# Altium PCB USB-C_Power_Supply_PCB.PcbDoc
Units mm, origin at the board's own origin, x right, y up, seen from the top; angles counter-clockwise.
Board outline 84.8 x 52.2 mm, 2 copper layers (Top Layer, Bottom Layer), stack 1.671 mm thick; 51 components, 22 nets, 140 pads, 639 vias.
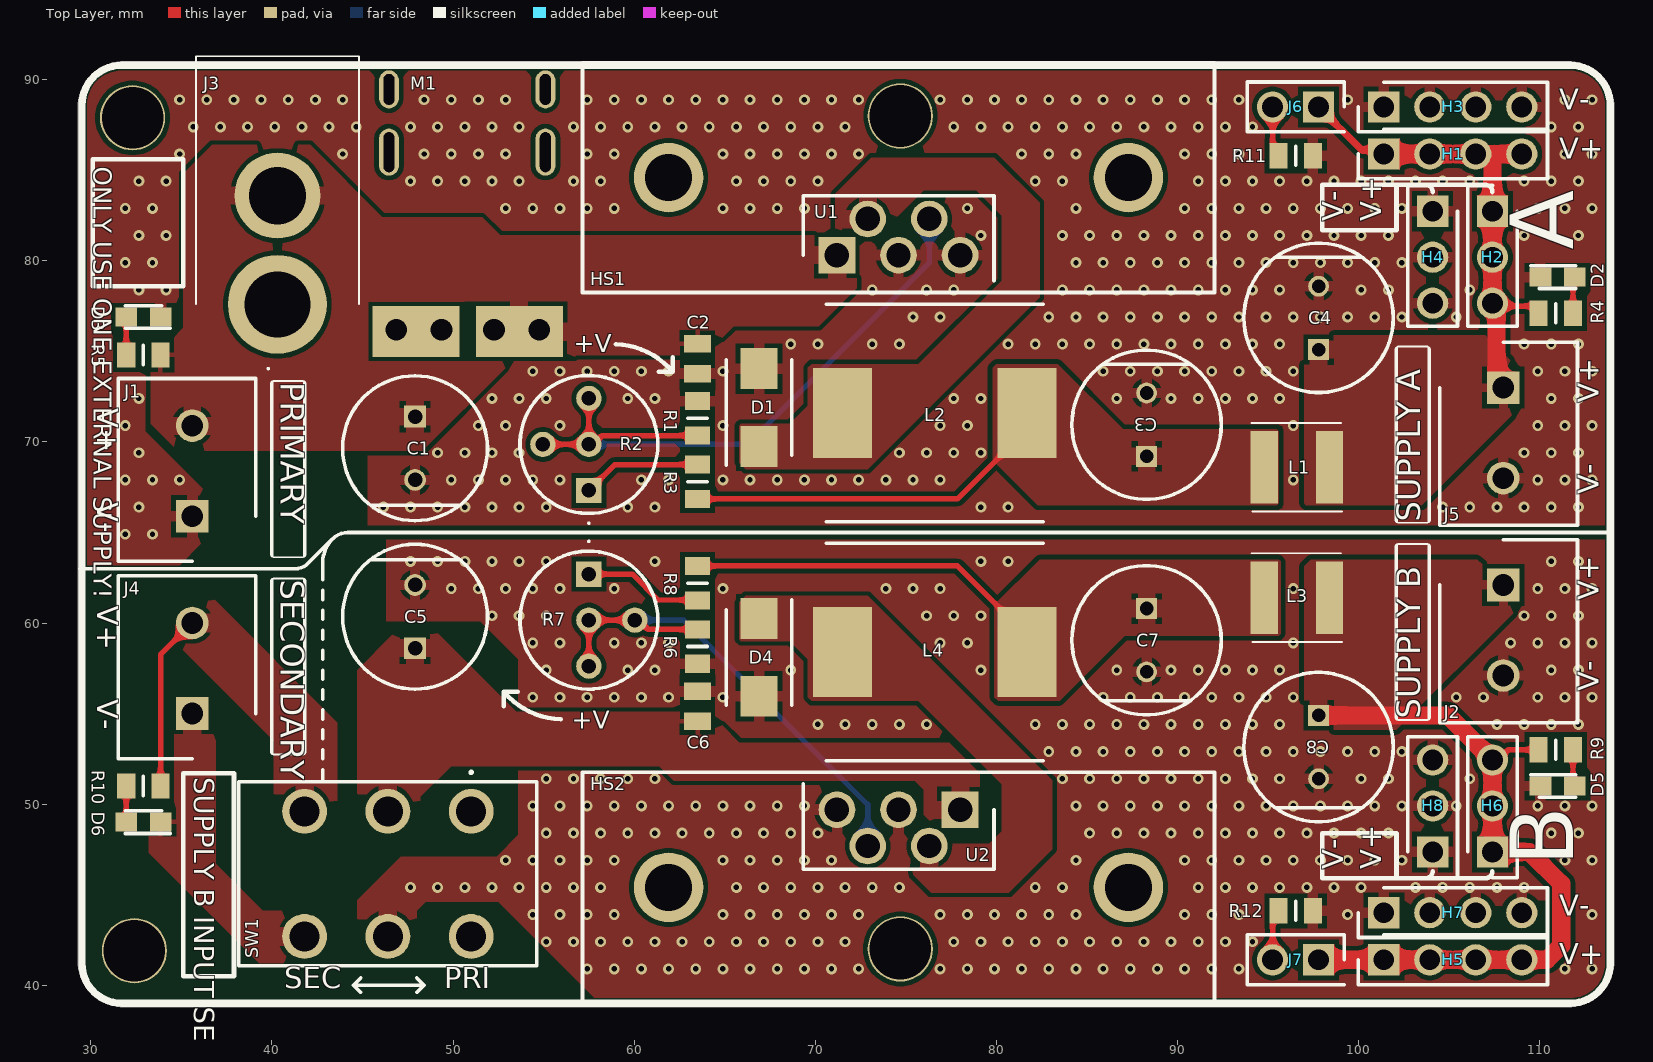
[diagram p0: Top Layer view]
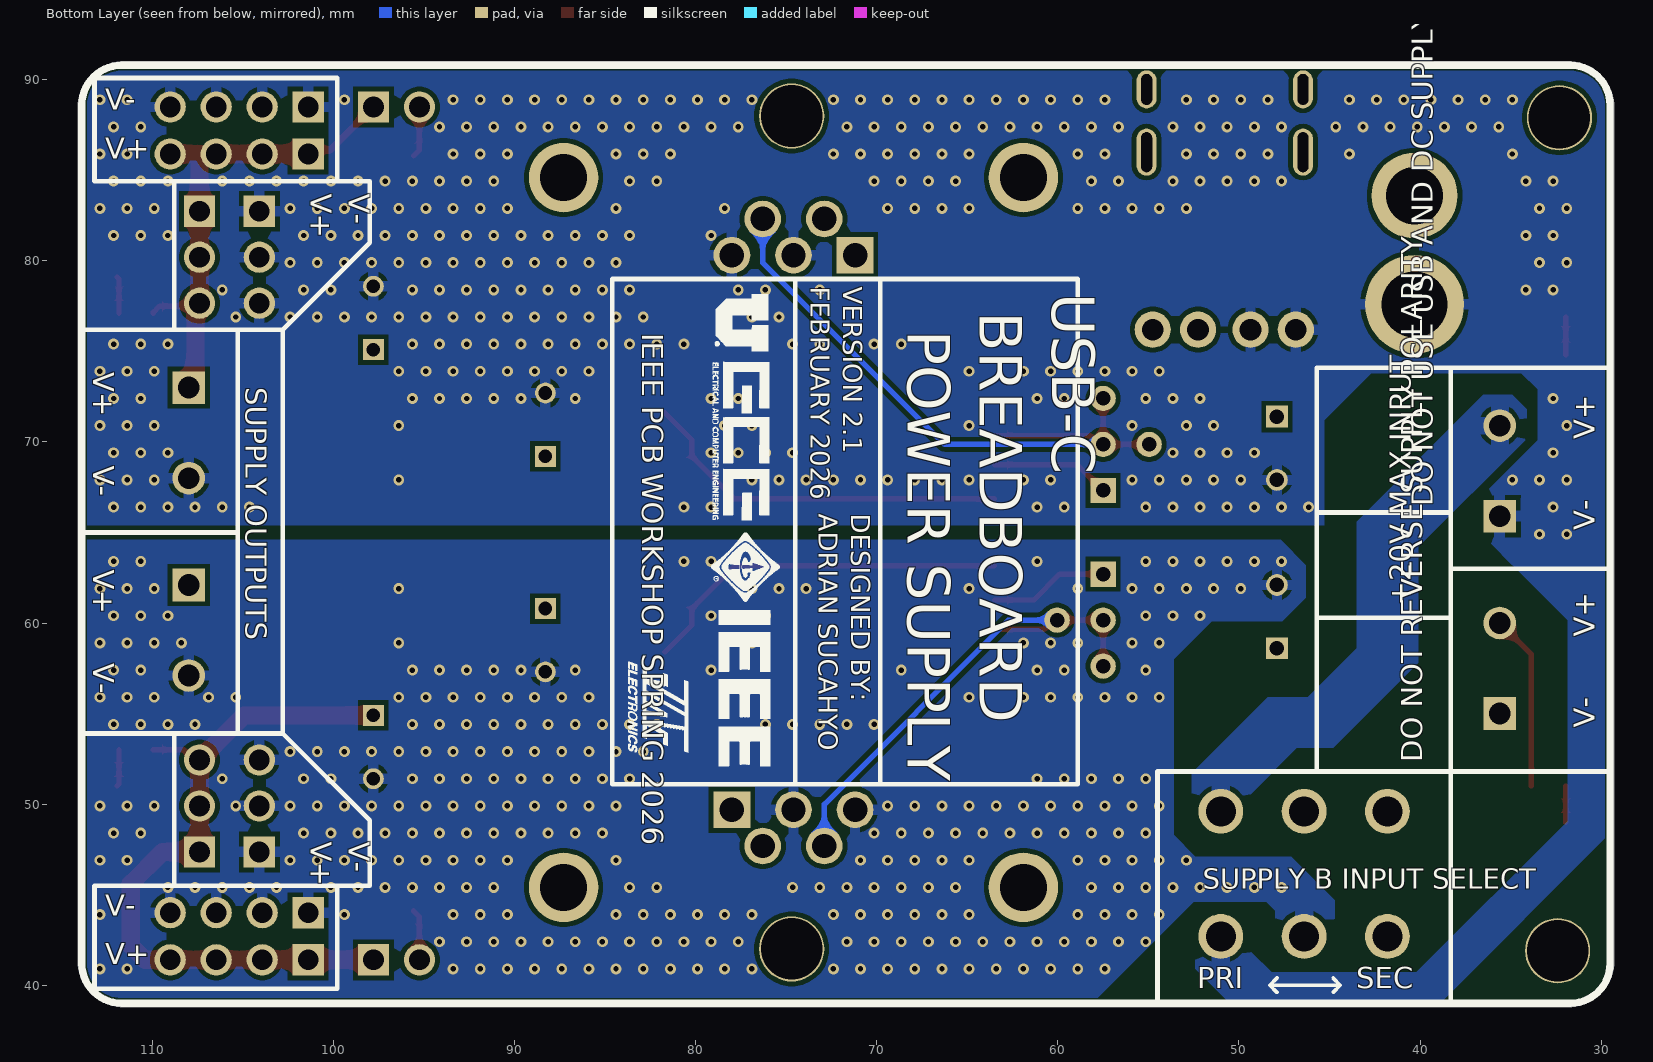
[diagram p1: Bottom Layer view, seen from below]
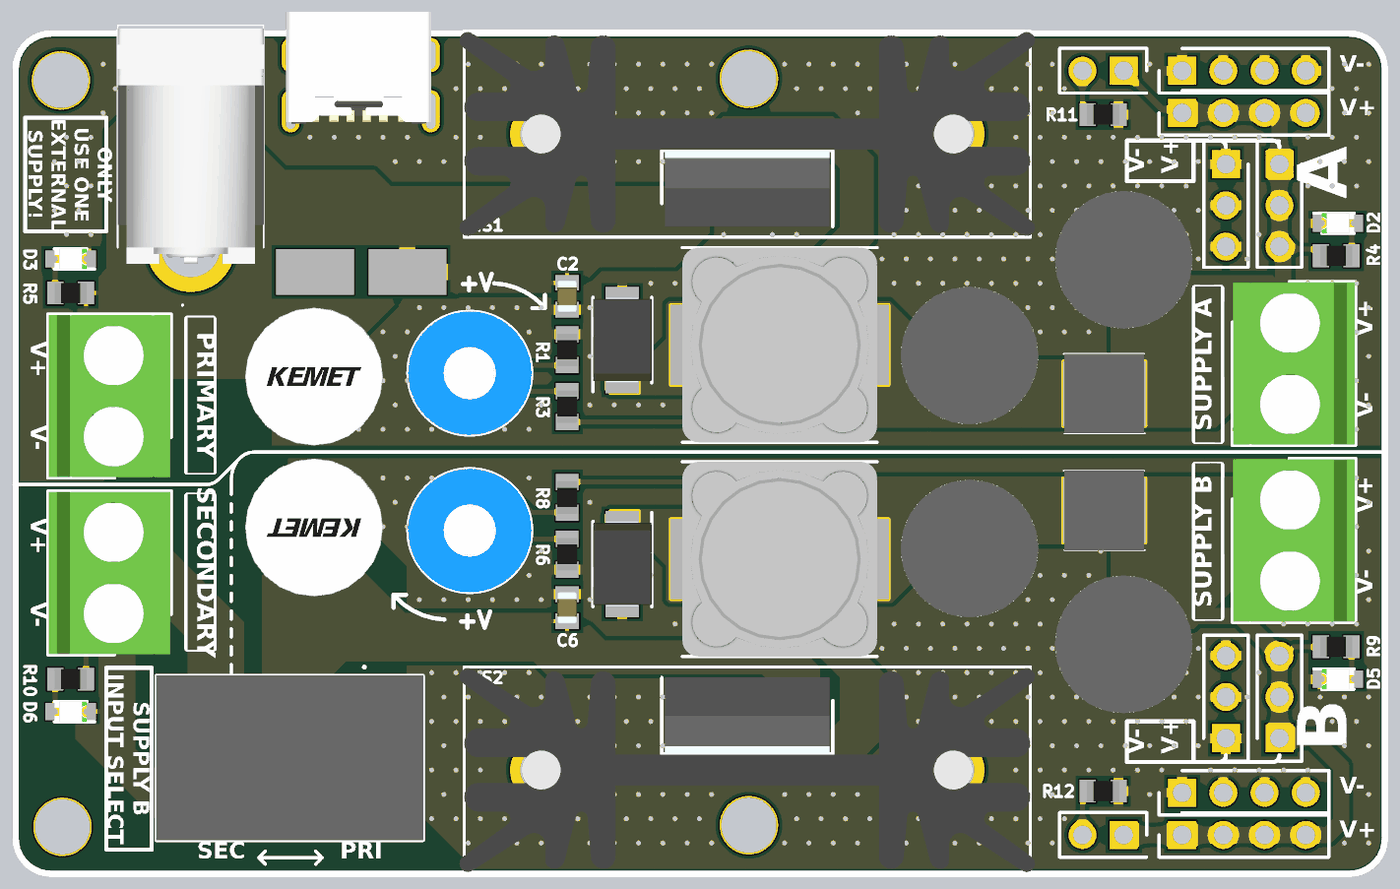
[diagram p2: 3D render of the assembled board from above, using the file's embedded part models]

## Layer stack, top to bottom
Top Solder: solder mask 0.0102, Solder Resist, Dk 3.5
Top Layer: signal copper 0.0356
Dielectric 1: dielectric 1.6, FR-4, Dk 4.8
Bottom Layer: signal copper 0.0356
Bottom Solder: solder mask 0.0102, Solder Resist, Dk 3.5

## Board outline
31.84,91 ccw(c31.84,88.46) 29.3,88.46 29.3,41.34 ccw(c31.84,41.34) 31.84,38.8 44.8,38.8 111.56,38.8 ccw(c111.56,41.34) 114.1,41.34 114.1,88.46 ccw(c111.56,88.46) 111.56,91

## Design rules (kind name [scope] priority, off if disabled: settings)
Clearance [All] p1: gap=0.254 ignorepadtopadclearanceinfootprint=TRUE except(0: Arc-Hole Track-Hole SMDPad-Hole THPad-Hole Via-Hole Fill-Hole Poly-Hole Region-Hole Text-Hole)
ComponentClearance [All] p1: gap=0 collisioncheckmode=3 verticalgap=0.254 showdistances=FALSE
Height [All] p1: minheight=0 maxheight=254 prefheight=12.7
HoleSize [All] p1: absolutevalues=TRUE maxlimit=25.4 minlimit=0.025 maxpercent=80.000 minpercent=20.000
MinimumSolderMaskSliver [All] p1: minsoldermaskwidth=0
PolygonConnect [All] p1: connectstyle=Relief reliefconductorwidth=0.254 reliefentries=4 polygonreliefangle="90 Angle" airgapwidth=0.254
RoutingVias [All] p1: holewidth=0.711 width=1.27 viastyle="Through Hole" minholewidth=0.711 minwidth=1.27 maxholewidth=0.711 maxwidth=1.27
SilkToSilkClearance [All] p1: silktosilkclearance=0
SilkToSolderMaskClearance [IsPad] p1: minsilkscreentomaskgap=0 clearancetoexposedcopper=TRUE
SolderMaskExpansion [All] p1: expansion=0.102 istentingtop=FALSE
SupplyNets "Schematic Supply Nets_7" [InNet('GND_A')] p1: voltage=0.000
SupplyNets "Schematic Supply Nets_6" [InNet('SEC_GND')] p2: voltage=0.000
SupplyNets "Schematic Supply Nets_5" [InNet('V_IN_B')] p3: voltage=0.000
SupplyNets "Schematic Supply Nets_4" [InNet('+VCC_A')] p4: voltage=0.000
SupplyNets "Schematic Supply Nets_3" [InNet('+VCC_B')] p5: voltage=0.000
SupplyNets "Schematic Supply Nets_2" [InNet('V_IN_A')] p6: voltage=0.000
SupplyNets "Schematic Supply Nets_1" [InNet('V_IN_SEC')] p7: voltage=0.000
SupplyNets "Schematic Supply Nets" [InNet('GND_B')] p8: voltage=0.000
Width [All] p1: maxlimit=2.54 minlimit=0.254 preferedwidth=1.27
24 further rules are at their usual default settings.

## Components (designator, comment, footprint, x,y, rotation, side; value= is the part's Value field where it differs from the comment)
C1 "ESL227M035AG8AA" CAPTH8.00X18.00-3.50 47.9,71.4 r270 top
C2 "100n" CAP0805 63.5,74.6 r270 top
C3 "REF0816471M025K" CAPTH8.00X16.00-3.50 88.3,69.2 r90 top
C4 "REF0816471M025K" CAPTH8.00X16.00-3.50 97.8,75.1 r90 top
C5 "ESL227M035AG8AA" CAPTH8.00X18.00-3.50 47.9,58.6 r90 top
C6 "100n" CAP0805 63.5,55.4 r90 top
C7 "REF0816471M025K" CAPTH8.00X16.00-3.50 88.3,60.8 r270 top
C8 "REF0816471M025K" CAPTH8.00X16.00-3.50 97.8,54.9 r270 top
D1 "SS510B" "DO-214AC (SMA)" 66.9,71.9 r90 top
D2 "LED" LEDM2012X80N 111,79.1 r0 top
D3 "LED" LEDM2012X80N 32.9,76.9 r180 top
D4 "SS510B" "DO-214AC (SMA)" 66.9,58.1 r270 top
D5 "LED" LEDM2012X80N 111,51 r0 top
D6 "LED" LEDM2012X80N 32.9,49 r180 top
H1 "Header" Header_1X4 101.4,85.9 r0 top
H2 "Header" Header_1X3 107.4,82.74 r270 top
H3 "Header" Header_1X4 101.4,88.5 r0 top
H4 "Header" Header_1X3 104.1,82.74 r270 top
H5 "Header" Header_1X4 101.4,41.4 r0 top
H6 "Header" Header_1X3 107.4,47.36 r90 top
H7 "Header" Header_1X4 101.4,44 r0 top
H8 "Header" Header_1X3 104.1,47.36 r90 top
HS1 "637-10ABPE" 63710ABPE 61.9,84.6 r0 top
HS2 "637-10ABPE" 63710ABPE 61.9,45.4 r0 top
J1 "691137710002" SHDR2W70P0X500_1X2_1000X750X1160P 35.6,65.9 r90 top
J2 "691137710002" SHDR2W70P0X500_1X2_1000X750X1160P 108,73 r270 top
J3 "PJ-037AH" PJ037AH 40.3,77.6 r270 top
J4 "691137710002" SHDR2W70P0X500_1X2_1000X750X1160P 35.6,55 r90 top
J5 "691137710002" SHDR2W70P0X500_1X2_1000X750X1160P 108,62.1 r270 top
J6 "90120-0762" Header_1X2 97.8,88.5 r180 top
J7 "90120-0762" Header_1X2 97.8,41.4 r180 top
L1 "NRS5030T4R7MMGJ" "IND (4.9mmx4.9mm)" 96.6,68.6 r0 top
L2 "SRR1210-151M" INDPM120120X1000N-D 76.6,71.6 r0 top
L3 "NRS5030T4R7MMGJ" "IND (4.9mmx4.9mm)" 96.6,61.4 r0 top
L4 "SRR1210-151M" INDPM120120X1000N-D 76.6,58.4 r0 top
M1 "USB-PD" USB_C-PD 56.16,74.5 r180 top
R1 "1k" RESC0805 63.5,71.3 r90 top
R2 "10k" "3339P1103LF - Modified" 57.5,67.32 r90 top
R3 "1k" RESC0805 63.5,67.8 r90 top
R4 "3.3k" RESC0805 110.9,77.1 r0 top
R5 "3.3k" RESC0805 32.9,74.8 r180 top
R6 "1k" RESC0805 63.5,58.7 r270 top
R7 "10k" "3339P1103LF - Modified" 57.5,62.7 r270 top
R8 "1k" RESC0805 63.5,62.2 r270 top
R9 "3.3k" RESC0805 110.9,53 r0 top
R10 "3.3k" RESC0805 32.9,51 r180 top
R11 "3.3k" RESC0805 96.535,85.8 r0 top
R12 "3.3k" RESC0805 96.535,44.1 r0 top
SW1 "GF-126-0305" GF1260305 51,49.6 r180 top
U1 "LM2576WT" TO-220-5 71.2,80.314 r0 top
U2 "LM2576WT" TO-220-5 78,49.686 r180 top

## Footprints (in the part's own frame and the unit in brackets; to place one, negate y for a bottom-side part, rotate by r counter-clockwise, add the part's x,y. Pads: shape width x height; smd on the part's side, far side on the other; paste and mask are expansions set on the pad)
"3339P1103LF - Modified" [mm]
  rect 1.4x1.4 hole 0.8: 1(0,0)
  round 1.4 hole 0.8: 2(2.54,0) 2(2.54,2.54) 3(5.08,0)
  silkscreen extent -1.86,-3.81 6.35,3.81, body extent -1.27,-3.81 6.35,3.81, height 6.42
63710ABPE [mm]
  round 3.84 hole 2.6: 1(0,0) 2(25.4,0)
  silkscreen extent -4.75,-6.35 30.15,6.35, body extent -5.03,-6.29 30.43,6.29, height 25.7
CAP0805 [mm] "Chip Capacitor, 2-Leads, Body 2.00x1.20mm, IPC Medium Density"
  rect 0.97x1.47 smd: 1(-0.83,0) 2(0.83,0)
  body extent -1,-0.63 1,0.63, height 1.45
CAPTH8.00X16.00-3.50 [mm]
  rect 1.15x1.15 hole 0.75: 1(0,0)
  round 1.15 hole 0.75: 2(3.5,0)
  silkscreen extent -2.37,-4.13 5.87,4.13, body extent -2.49,-4.25 6,4.25, height 18
CAPTH8.00X18.00-3.50 [mm]
  rect 1.2x1.2 hole 0.8: 1(0,0)
  round 1.2 hole 0.8: 2(3.5,0)
  silkscreen extent -2.25,-4 5.75,4, body extent -2.48,-4.25 5.98,4.25, height 18.01
"DO-214AC (SMA)" [mm]
  rect 2.25x2.05 smd: 1(-2.15,0) 2(2.15,0)
  silkscreen extent -3.17,-1.81 2.64,1.81, body extent -2.64,-1.81 2.64,1.81, height 2.44
GF1260305 [mm]
  round 2.475 hole 1.65: 1(0,0) 2(4.6,0) 3(9.2,0) 4(9.2,6.91) 5(4.6,6.91) 6(0,6.91)
  silkscreen extent -3.63,-2.2 12.83,8.53, body extent -3.63,-1.63 12.83,8.53, height 15.06
Header_1X2 [mm]
  rect 1.725x1.725 hole 1.15: 1(0,0)
  round 1.725 hole 1.15: 2(2.54,0)
  silkscreen extent -1.42,-1.38 3.95,1.37
Header_1X3 [mm]
  rect 1.725x1.725 hole 1.15: 1(0,0)
  round 1.725 hole 1.15: 2(2.54,0) 3(5.08,0)
  silkscreen extent -1.42,-1.37 6.35,1.37
Header_1X4 [mm]
  rect 1.725x1.725 hole 1.15: 1(0,0)
  round 1.725 hole 1.15: 2(2.54,0) 3(5.08,0) 4(7.62,0)
  silkscreen extent -1.42,-1.37 9.04,1.37
"IND (4.9mmx4.9mm)" [mm]
  rect 1.5x4 smd: 1(-1.8,0) 2(1.8,0)
  silkscreen extent -2.5,-2.45 2.5,2.45, body extent -2.45,-2.45 2.45,2.45, height 4.1
INDPM120120X1000N-D [mm]
  rect 3.25x4.95 smd: 1(-5.1,0) 2(5.1,0)
  silkscreen extent -6,-6 6,6, body extent -6,-6 6,6, height 10
LEDM2012X80N [mm]
  rect 1.2x1.05 smd: 1(-0.95,0) 2(0.95,0)
  silkscreen extent -1.48,-0.63 1,0.63, body extent -1,-0.63 1,0.63, height 0.7
PJ037AH [mm]
  round 5.46 hole 3.64: 1(0,0)
  round 4.74 hole 3.16: 2(-6,0)
  silkscreen extent -13.7,-4.5 3.6,4.5, body extent -13.5,-4.5 1,4.5, height 11
RESC0805 [mm] "Chip Resistor, 2-Leads, Body 2.00x1.20mm, IPC Medium Density"
  rect 1x1.4 smd: 1(-0.95,0) 2(0.95,0)
  silkscreen extent 0,-0.53 0,0.53, body extent -1,-0.63 1,0.63, height 0.5
SHDR2W70P0X500_1X2_1000X750X1160P [mm]
  rect 1.8x1.8 hole 1.2: 1(0,0)
  round 1.8 hole 1.2: 2(5,0)
  silkscreen extent -2.5,-3.5 7.6,4.1, body extent -2.45,-3.45 7.55,4.05, height 11.5
TO-220-5 [mm]
  rect 2.025x2.025 hole 1.35: 1(0,0)
  round 2.025 hole 1.35: 2(1.7,2) 3(3.4,0) 4(5.1,2) 5(6.8,0)
  silkscreen extent -1.87,-1.42 8.67,3.28, body extent -1.68,-1.42 8.48,3.28, height 17.61
USB_C-PD [mm]
  round 2 hole 1.2: 1(1.4,-1.7) 1(3.9,-1.7) 2(6.8,-1.7) 2(9.3,-1.7)
  rect 4.8x2.8 smd: 1(2.5,-1.6) 2(8.2,-1.6)
  oval 1.1x2.6 hole 0.6 slot 2.2 at 90 deg: 3(1.06,-11.5) 6(9.7,-11.5)
  oval 1.1x2.1 hole 0.6 slot 1.7 at 90 deg: 4(1.062,-14.967) 5(9.698,-14.967)
  body extent 0,-17.64 10.7,0, height 4.96

## Part data
C1 C5: "Capacitor Polarised", Manufacturer_Name=KEMET, Mouser Part Number=80-ESL227M035AG8AA, Datasheet Link=https://content.kemet.com/datasheets/KEM_A4074_ESL.pdf, Height=18mm, Manufacturer_Part_Number=ESL227M035AG8AA, Mouser Price/Stock=https://www.mouser.co.uk/ProductDetail/KEMET/ESL227M035AG8AA?qs=HXFqYaX1Q2yHN7oCVXkyWQ%3D%3D
C2 C6: library part "Capacitor - Non Polarized", "Non Polarized Capacitor"
C3 C4 C7 C8: "Capacitor Polarised", Manufacturer_Name="Kyocera AVX", Mouser Part Number=581-REF0816471M025K, Datasheet Link=https://www.digikey.ph/en/products/detail/kyocera-avx/REF0816471M025K/20096764?msockid=39f1ec84d77b6f4428b7f904d6676eed, Height=18mm, Manufacturer_Part_Number=REF0816471M025K, Mouser Price/Stock=https://www.mouser.co.uk/ProductDetail/KYOCERA-AVX/REF0816471M025K?qs=Y0Uzf4wQF3mKMY7CWvU3GA%3D%3D
D1 D4: "Diode", Manufacturer_Name="HY Electronic", Height=2.44mm, Manufacturer_Part_Number=SS510B
D2 D3 D5 D6: "General Purpose LED", ComponentLink1Description=Datasheet, ComponentLink1URL=https://www.smc-diodes.com/propdf/1N4148W%20N0571%20REV.E.pdf
H1 H3 H5 H7: library part "4-Pin Header", "4-Pin Header"
H2 H4 H6 H8: library part "3-Pin Header", "3-Pin Header"
HS1 HS2: "Undefined or Miscellaneous", Manufacturer_Name="Wakefield Thermal", Mouser Part Number=567-637-10ABPE, Datasheet Link=https://media.digikey.com/pdf/Data%20Sheets/Wakefield%20Thermal%20PDFs/634%20Heat%20Sinks.pdf, Height=25.4mm, Manufacturer_Part_Number=637-10ABPE, Mouser Price/Stock=https://www.mouser.co.uk/ProductDetail/Wakefield-Vette/637-10ABPE?qs=1%252ByrAFyf4wFy1bU0h8s7wA%3D%3D
J1 J2 J4 J5: "Connector", Manufacturer_Name="Wurth Elektronik", Mouser Part Number=710-691137710002, Datasheet Link=https://katalog.we-online.com/em/datasheet/691137710002.pdf, Height=11.6mm, Manufacturer_Part_Number=691137710002, Mouser Price/Stock=https://www.mouser.co.uk/ProductDetail/Wurth-Elektronik/691137710002?qs=lBTPRtX1sU9LnHBbviNKGA%3D%3D
J3: "Connector", Manufacturer_Name="Same Sky", Mouser Part Number=490-PJ-037AH, Arrow Part Number=PJ-037AH, Arrow Price/Stock=https://www.arrow.com/en/products/pj-037ah/cui-devices?region=nac, Datasheet Link=https://www.arrow.com/en/products/pj-037ah/cui-devices, Height=11.2mm, Manufacturer_Part_Number=PJ-037AH, Mouser Price/Stock=https://www.mouser.co.uk/ProductDetail/CUI-Devices/PJ-037AH?qs=WyjlAZoYn50M7m1AkzfPaQ%3D%3D
J6 J7: "Connector", Manufacturer_Name=Molex, Mouser Part Number=538-90120-0762, Arrow Part Number=90120-0762, Arrow Price/Stock=https://www.arrow.com/en/products/90120-0762/molex?region=nac, Datasheet Link=http://www.molex.com/pdm_docs/sd/901200762_sd.pdf, Height=5.6mm, Manufacturer_Part_Number=90120-0762, Mouser Price/Stock=https://www.mouser.co.uk/ProductDetail/Molex/90120-0762?qs=NKHyz0HolODkarWFh2VFww%3D%3D
L1 L3: "Inductor", Manufacturer_Name="TAIYO YUDEN", Mouser Part Number=963-NRS5030T4R7MMGJ, Arrow Part Number=NRS5030T4R7MMGJ, Arrow Price/Stock=null?utm_currency=USD&region=nac, Datasheet Link=https://www.yuden.co.jp/productdata/catalog/wound04_e.pdf, Height=3.1mm, Manufacturer_Part_Number=NRS5030T4R7MMGJ, Mouser Price/Stock=https://www.mouser.co.uk/ProductDetail/TAIYO-YUDEN/NRS5030T4R7MMGJ?qs=CNQs48zzdnpF%252BjDsFjbDtA%3D%3D
L2 L4: "Inductor", Manufacturer_Name=Bourns, Mouser Part Number=652-SRR1210-151M, Arrow Part Number=SRR1210-151M, Arrow Price/Stock=https://www.arrow.com/en/products/srr1210-151m/bourns?region=nac, Datasheet Link=https://www.bourns.com/docs/Product-Datasheets/SRR1210.pdf, Height=10mm, Manufacturer_Part_Number=SRR1210-151M, Mouser Price/Stock=https://www.mouser.co.uk/ProductDetail/Bourns/SRR1210-151M?qs=4vvWAaIu%2Fq7S1x5W5meWRQ%3D%3D
R1 R3 R4 R5 R6 R8 R9 R10 R11 R12: library part Resistor, "Resistor"
R2 R7: library part Potentiometer, "Potentionmeter"
SW1: "DPDT Slide Switch"
U1 U2: "Integrated Circuit", Arrow Part Number=LM2576-5.0WU-TR, Manufacturer_Name=Microchip, Manufacturer_Part_Number=LM2576WU-TR, Mouser Part Number=998-LM2576WT, Arrow Price/Stock=https://www.arrow.com/en/products/lm2576-5.0wu-tr/microchip-technology?region=nac, Datasheet Link=http://ww1.microchip.com/downloads/en/DeviceDoc/lm2576.pdf, Mouser Price/Stock=https://www.mouser.co.uk/ProductDetail/Microchip-Technology/LM2576-5.0WU-TR?qs=Y3Q3JoKAO1SBuj%2FVzZkeQA%3D%3D

## Free pads (board coordinates)
  round 3.6 hole 3.4 unplated: 5(32.3,87.9) 5(32.4,41.9) 5(74.7,42) 5(74.7,88)

## Via types
v1: diameter 0.6, hole 0.3, Top Layer to Bottom Layer, tented both sides, 639 vias

## Nets (pads, with @x,y where several pads share a name; then routed paths per layer and width w, separated by ;. In a path a pad name is that pad's centre, name@x,y a point inside that pad or via, vN(x,y) a via of type N, cw(c..) or ccw(c..) an arc to the next point about the centre after c; other vN are vias at no path point)
+VCC_A: C4.1 H1.1 H1.2 H1.3 H1.4 H2.1 H2.2 H2.3 J2.1 J6.1 L1.2 R4.1 | length 28.3
  Top Layer w0.3: H2.3 107.56,77.5 109.6,77.5 109.95,77.15 R4.1
  Top Layer w0.4: J6.1 100.172,86.128 101.172,86.128 H1.1
  Top Layer w1: H1.1 H1.2 H1.3 107.5,85.9 ; J2.1 107.632,73.368 107.632,77.231 107.4,77.464 H2.3 H2.2 H2.1 107.4,85.8 107.5,85.9 ; H1.4 107.5,85.9
+VCC_B: C8.1 H5.1 H5.2 H5.3 H5.4 H6.1 H6.2 H6.3 J5.1 J7.1 L3.2 R9.1 | length 40.1
  Top Layer w0.3: H6.3 107.728,52.44 108.288,53 R9.1
  Top Layer w1: J7.1 H5.1 H5.2 H5.3 H5.4 110.4,41.4 111.2,42.2 111.2,45.6 109.44,47.36 H6.1 H6.2 H6.3 104.94,54.9 C8.1
GND_A: C1.2 C2.2 C3.2 C4.2 D1.2 D2.1 D3.1 H3.1 H3.2 H3.3 H3.4 H4.1 H4.2 H4.3 J1.1 J2.2 J3.1 M1.2 R1.2 R11.2 SW1.6 U1.3 U1.5
  other v1: 31.9,64.9 33.4,64.9 32.65,66.4 46.15,66.4 47.65,66.4 49.15,66.4 50.65,66.4 52.15,66.4 53.65,66.4 55.15,66.4 59.65,66.4 61.15,66.4 79.15,66.4 80.65,66.4 104.65,66.4 106.15,66.4 107.65,66.4 109.15,66.4 110.65,66.4 112.15,66.4 31.9,67.9 33.4,67.9 34.9,67.9 49.9,67.9 51.4,67.9 52.9,67.9 54.4,67.9 55.9,67.9 60.4,67.9 61.9,67.9 64.9,67.9 66.4,67.9 67.9,67.9 69.4,67.9 70.9,67.9 72.4,67.9 73.9,67.9 75.4,67.9 76.9,67.9 96.4,67.9 109.9,67.9 111.4,67.9 112.9,67.9 32.65,69.4 49.15,69.4 50.65,69.4 52.15,69.4 53.65,69.4 74.65,69.4 76.15,69.4 77.65,69.4 79.15,69.4 109.15,69.4 110.65,69.4 112.15,69.4 31.9,70.9 51.4,70.9 52.9,70.9 55.9,70.9 64.9,70.9 76.9,70.9 78.4,70.9 96.4,70.9 109.9,70.9 111.4,70.9 112.9,70.9 32.65,72.4 52.15,72.4 53.65,72.4 55.15,72.4 59.65,72.4 61.15,72.4 77.65,72.4 79.15,72.4 86.65,72.4 89.65,72.4 91.15,72.4 92.65,72.4 94.15,72.4 95.65,72.4 110.65,72.4 112.15,72.4 54.4,73.9 55.9,73.9 57.4,73.9 58.9,73.9 60.4,73.9 61.9,73.9 64.9,73.9 85.9,73.9 87.4,73.9 88.9,73.9 90.4,73.9 91.9,73.9 93.4,73.9 94.9,73.9 96.4,73.9 109.9,73.9 111.4,73.9 112.9,73.9 68.65,75.4 70.15,75.4 73.15,75.4 74.65,75.4 80.65,75.4 82.15,75.4 83.65,75.4 85.15,75.4 86.65,75.4 88.15,75.4 89.65,75.4 91.15,75.4 92.65,75.4 94.15,75.4 95.65,75.4 109.15,75.4 110.65,75.4 112.15,75.4 75.4,76.9 76.9,76.9 82.9,76.9 84.4,76.9 85.9,76.9 87.4,76.9 88.9,76.9 90.4,76.9 91.9,76.9 93.4,76.9 94.9,76.9 96.4,76.9 97.9,76.9 99.4,76.9 100.9,76.9 102.4,76.9 105.4,76.9 32.65,78.4 34.15,78.4 73.15,78.4 76.15,78.4 77.65,78.4 83.65,78.4 85.15,78.4 86.65,78.4 88.15,78.4 89.65,78.4 91.15,78.4 92.65,78.4 94.15,78.4 95.65,78.4 100.15,78.4 101.65,78.4 106.15,78.4 31.9,79.9 33.4,79.9 84.4,79.9 85.9,79.9 87.4,79.9 88.9,79.9 90.4,79.9 91.9,79.9 93.4,79.9 94.9,79.9 96.4,79.9 97.9,79.9 99.4,79.9 100.9,79.9 102.4,79.9 32.65,81.4 34.15,81.4 79.15,81.4 83.65,81.4 85.15,81.4 86.65,81.4 88.15,81.4 89.65,81.4 91.15,81.4 92.65,81.4 94.15,81.4 95.65,81.4 97.15,81.4 98.65,81.4 100.15,81.4 101.65,81.4 109.15,81.4 110.65,81.4 112.15,81.4 31.9,82.9 33.4,82.9 52.9,82.9 54.4,82.9 55.9,82.9 57.4,82.9 58.9,82.9 64.9,82.9 66.4,82.9 67.9,82.9 69.4,82.9 78.4,82.9 84.4,82.9 90.4,82.9 91.9,82.9 93.4,82.9 94.9,82.9 96.4,82.9 97.9,82.9 99.4,82.9 100.9,82.9 102.4,82.9 109.9,82.9 111.4,82.9 112.9,82.9 32.65,84.4 34.15,84.4 47.65,84.4 49.15,84.4 50.65,84.4 52.15,84.4 53.65,84.4 56.65,84.4 58.15,84.4 65.65,84.4 67.15,84.4 68.65,84.4 70.15,84.4 82.15,84.4 83.65,84.4 91.15,84.4 92.65,84.4 94.15,84.4 95.65,84.4 97.15,84.4 98.65,84.4 100.15,84.4 101.65,84.4 103.15,84.4 104.65,84.4 106.15,84.4 109.15,84.4 110.65,84.4 112.15,84.4 34.9,85.9 43.9,85.9 48.4,85.9 49.9,85.9 51.4,85.9 52.9,85.9 57.4,85.9 58.9,85.9 64.9,85.9 66.4,85.9 67.9,85.9 69.4,85.9 70.9,85.9 72.4,85.9 81.4,85.9 82.9,85.9 84.4,85.9 90.4,85.9 91.9,85.9 93.4,85.9 111.4,85.9 112.9,85.9 35.65,87.4 37.15,87.4 38.65,87.4 40.15,87.4 41.65,87.4 43.15,87.4 44.65,87.4 47.65,87.4 49.15,87.4 50.65,87.4 52.15,87.4 53.65,87.4 56.65,87.4 58.15,87.4 59.65,87.4 61.15,87.4 62.65,87.4 64.15,87.4 65.65,87.4 67.15,87.4 68.65,87.4 70.15,87.4 71.65,87.4 77.65,87.4 79.15,87.4 80.65,87.4 82.15,87.4 83.65,87.4 85.15,87.4 86.65,87.4 88.15,87.4 89.65,87.4 91.15,87.4 92.65,87.4 94.15,87.4 110.65,87.4 112.15,87.4 34.9,88.9 36.4,88.9 37.9,88.9 39.4,88.9 40.9,88.9 42.4,88.9 43.9,88.9 48.4,88.9 49.9,88.9 51.4,88.9 52.9,88.9 57.4,88.9 58.9,88.9 60.4,88.9 61.9,88.9 63.4,88.9 64.9,88.9 66.4,88.9 67.9,88.9 69.4,88.9 70.9,88.9 72.4,88.9 76.9,88.9 78.4,88.9 79.9,88.9 81.4,88.9 82.9,88.9 84.4,88.9 85.9,88.9 87.4,88.9 88.9,88.9 90.4,88.9 91.9,88.9 93.4,88.9 99.4,88.9 111.4,88.9 112.9,88.9
GND_B: C5.2 C6.2 C7.2 C8.2 D4.2 D5.1 H7.1 H7.2 H7.3 H7.4 H8.1 H8.2 H8.3 J5.2 R6.2 R12.2 SW1.5 U2.3 U2.5
  other v1: 57.4,40.9 58.9,40.9 60.4,40.9 61.9,40.9 63.4,40.9 64.9,40.9 66.4,40.9 67.9,40.9 69.4,40.9 70.9,40.9 72.4,40.9 76.9,40.9 78.4,40.9 79.9,40.9 81.4,40.9 82.9,40.9 84.4,40.9 85.9,40.9 87.4,40.9 88.9,40.9 90.4,40.9 91.9,40.9 93.4,40.9 111.4,40.9 112.9,40.9 55.15,42.4 56.65,42.4 58.15,42.4 59.65,42.4 61.15,42.4 62.65,42.4 64.15,42.4 65.65,42.4 67.15,42.4 68.65,42.4 70.15,42.4 71.65,42.4 77.65,42.4 79.15,42.4 80.65,42.4 82.15,42.4 83.65,42.4 85.15,42.4 86.65,42.4 88.15,42.4 89.65,42.4 91.15,42.4 92.65,42.4 94.15,42.4 54.4,43.9 55.9,43.9 57.4,43.9 58.9,43.9 64.9,43.9 66.4,43.9 67.9,43.9 69.4,43.9 70.9,43.9 72.4,43.9 76.9,43.9 78.4,43.9 79.9,43.9 81.4,43.9 82.9,43.9 84.4,43.9 90.4,43.9 91.9,43.9 93.4,43.9 99.4,43.9 112.9,43.9 47.65,45.4 49.15,45.4 50.65,45.4 52.15,45.4 53.65,45.4 55.15,45.4 56.65,45.4 58.15,45.4 65.65,45.4 67.15,45.4 68.65,45.4 70.15,45.4 71.65,45.4 73.15,45.4 74.65,45.4 82.15,45.4 83.65,45.4 91.15,45.4 92.65,45.4 94.15,45.4 95.65,45.4 97.15,45.4 98.65,45.4 100.15,45.4 103.15,45.4 104.65,45.4 106.15,45.4 107.65,45.4 109.15,45.4 52.9,46.9 54.4,46.9 55.9,46.9 57.4,46.9 58.9,46.9 64.9,46.9 66.4,46.9 67.9,46.9 69.4,46.9 70.9,46.9 84.4,46.9 90.4,46.9 91.9,46.9 93.4,46.9 94.9,46.9 96.4,46.9 97.9,46.9 99.4,46.9 100.9,46.9 102.4,46.9 111.4,46.9 112.9,46.9 55.15,48.4 56.65,48.4 58.15,48.4 59.65,48.4 61.15,48.4 62.65,48.4 64.15,48.4 65.65,48.4 67.15,48.4 68.65,48.4 70.15,48.4 85.15,48.4 86.65,48.4 88.15,48.4 89.65,48.4 91.15,48.4 92.65,48.4 94.15,48.4 95.65,48.4 97.15,48.4 98.65,48.4 100.15,48.4 101.65,48.4 110.65,48.4 112.15,48.4 54.4,49.9 55.9,49.9 57.4,49.9 58.9,49.9 60.4,49.9 61.9,49.9 63.4,49.9 64.9,49.9 66.4,49.9 67.9,49.9 69.4,49.9 84.4,49.9 85.9,49.9 87.4,49.9 88.9,49.9 90.4,49.9 91.9,49.9 93.4,49.9 94.9,49.9 96.4,49.9 97.9,49.9 99.4,49.9 100.9,49.9 102.4,49.9 105.4,49.9 109.9,49.9 111.4,49.9 112.9,49.9 55.15,51.4 56.65,51.4 58.15,51.4 59.65,51.4 61.15,51.4 83.65,51.4 85.15,51.4 86.65,51.4 88.15,51.4 89.65,51.4 91.15,51.4 92.65,51.4 94.15,51.4 95.65,51.4 100.15,51.4 101.65,51.4 106.15,51.4 82.9,52.9 84.4,52.9 85.9,52.9 87.4,52.9 88.9,52.9 90.4,52.9 91.9,52.9 93.4,52.9 94.9,52.9 96.4,52.9 97.9,52.9 99.4,52.9 100.9,52.9 102.4,52.9 70.15,54.4 71.65,54.4 73.15,54.4 74.65,54.4 76.15,54.4 82.15,54.4 83.65,54.4 85.15,54.4 86.65,54.4 88.15,54.4 89.65,54.4 91.15,54.4 92.65,54.4 94.15,54.4 95.65,54.4 107.65,54.4 109.15,54.4 110.65,54.4 112.15,54.4 54.4,55.9 55.9,55.9 57.4,55.9 58.9,55.9 60.4,55.9 61.9,55.9 64.9,55.9 85.9,55.9 87.4,55.9 88.9,55.9 90.4,55.9 91.9,55.9 93.4,55.9 94.9,55.9 96.4,55.9 105.4,55.9 106.9,55.9 109.9,55.9 111.4,55.9 112.9,55.9 55.15,57.4 59.65,57.4 61.15,57.4 68.65,57.4 79.15,57.4 86.65,57.4 89.65,57.4 91.15,57.4 92.65,57.4 94.15,57.4 95.65,57.4 110.65,57.4 112.15,57.4 54.4,58.9 55.9,58.9 58.9,58.9 60.4,58.9 61.9,58.9 76.9,58.9 78.4,58.9 96.4,58.9 108.4,58.9 109.9,58.9 111.4,58.9 112.9,58.9 52.15,60.4 53.65,60.4 55.15,60.4 76.15,60.4 77.65,60.4 79.15,60.4 109.15,60.4 110.65,60.4 112.15,60.4 49.9,61.9 51.4,61.9 52.9,61.9 54.4,61.9 55.9,61.9 58.9,61.9 64.9,61.9 73.9,61.9 75.4,61.9 76.9,61.9 96.4,61.9 109.9,61.9 111.4,61.9 112.9,61.9 47.65,63.4 49.15,63.4 50.65,63.4 52.15,63.4 53.65,63.4 55.15,63.4 61.15,63.4 79.15,63.4 80.65,63.4 110.65,63.4 112.15,63.4
NetC3_1: C3.1 L1.1 L2.2 R3.1 | length 20.7
  Top Layer w0.3: R3.1 77.85,66.85 80.225,69.225 80.225,70.125 L2.2
NetC7_1: C7.1 L3.1 L4.2 R8.1 | length 20.7
  Top Layer w0.3: R8.1 77.85,63.15 80.225,60.775 80.225,59.875 L4.2
NetD1_1: D1.1 L2.1 U1.2
NetD2_2: D2.2 R4.2 | length 2
  Top Layer w0.3: R4.2 111.85,79 D2.2
NetD3_2: D3.2 R5.2 | length 2.1
  Top Layer w0.3: R5.2 D3.2
NetD4_1: D4.1 L4.1 U2.2
NetD5_2: D5.2 R9.2 | length 2
  Top Layer w0.3: R9.2 111.85,51.1 D5.2
NetD6_2: D6.2 R10.2 | length 2
  Top Layer w0.3: D6.2 R10.2
NetJ6_2: J6.2 R11.1 | length 2.8
  Top Layer w0.3: J6.2 95.26,86.125 R11.1
NetJ7_2: J7.2 R12.1 | length 2.8
  Top Layer w0.3: J7.2 95.26,43.775 R12.1
NetR1_1: R1.1 R2.2 R2.3 U1.4 | length 36.7
  Top Layer w0.3: R2.2@54.96,69.86 R2.2@57.5,69.86 ; R2.3 R2.2@57.5,69.86 ; R1.1 58.226,70.35 57.736,69.86 R2.2@57.5,69.86
  Bottom Layer w0.3: R2.2@57.5,69.86 66.26,69.86 76.3,79.9 U1.4
NetR2_1: R2.1 R3.2 | length 6.6
  Top Layer w0.3: R2.1 58.93,68.75 R3.2
NetR6_1: R6.1 R7.2 R7.3 U2.4 | length 28.1
  Top Layer w0.3: R7.3 57.5,60.16 60.04,60.16 60.256,60.16 60.766,59.65 R6.1
  Bottom Layer w0.3: R7.2@60.04,60.16 62.729,60.16 72.9,49.989 U2.4
NetR7_1: R7.1 R8.2 | length 6.6
  Top Layer w0.3: R7.1 59.9,62.7 61.33,61.27 R8.2@63.5,61.27
SEC_GND: D6.1 J4.1 SW1.4
V_IN_A: C1.1 C2.1 J1.2 J3.2 M1.1 R5.1 SW1.1 U1.1
V_IN_B: C5.1 C6.1 SW1.2 U2.1
V_IN_SEC: J4.2 R10.1 SW1.3 | length 9.7
  Top Layer w0.3: R10.1 33.85,58.25 J4.2
pads on no net: HS1.1 HS1.2 HS2.1 HS2.2 M1.3 M1.4 M1.5 M1.6

## Polygon pours and split planes (outlines as drawn)
no net on Top Overlay "NONET_L-01_P-001" (solid): 103.8,54.6 ccw(c103.8,54.8) 104,54.8 104,64.2 ccw(c103.8,64.2) 103.8,64.4 102.2,64.4 ccw(c102.2,64.2) 102,64.2 102,54.8 ccw(c102.2,54.8) 102.2,54.6
no net on Top Overlay "NONET_L-01_P-001" (solid): 103.8,65.5 ccw(c103.8,65.7) 104,65.7 104,75.1 ccw(c103.8,75.1) 103.8,75.3 102.2,75.3 ccw(c102.2,75.1) 102,75.1 102,65.7 ccw(c102.2,65.7) 102.2,65.5
no net on Top Overlay "NONET_L-01_P-001" (solid): 40.1,73.4 ccw(c40.1,73.2) 39.9,73.2 39.9,63.8 ccw(c40.1,63.8) 40.1,63.6 41.7,63.6 ccw(c41.7,63.8) 41.9,63.8 41.9,73.2 ccw(c41.7,73.2) 41.7,73.4
no net on Top Overlay "NONET_L-01_P-001" (solid, pour order 0): 40.1,62.5 ccw(c40.1,62.3) 39.9,62.3 39.9,52.9 ccw(c40.1,52.9) 40.1,52.7 41.7,52.7 ccw(c41.7,52.9) 41.9,52.9 41.9,62.3 ccw(c41.7,62.3) 41.7,62.5
V_IN_A on Top Layer "NONET_L-01_P-001" (solid, remove dead copper, pour order 5): 51.6,82.4 52.6,81.4 72.2,81.4 72.3,81.3 72.3,78.5 70.2,76.4 65.5,76.4 63.9,74.8 56.8,74.8 56.5,74.5 53.3,74.5 48.3,69.5 34.8,69.5 33.3,71 33.3,75.5 33.4,75.6 34.4,75.6 35.1,76.3 35.1,84.8 36.7,86.4 42.1,86.4 46.1,82.4
GND_A on Top Layer "NONET_L-01_P-001" (solid, remove dead copper, pour order 16): 37.1,65.4 37.1,66.5 33,70.6 33,72.4 34.4,73.8 42.7,73.8 45.3,71.2 45.3,65.4 113.6,65.4 113.6,88.6 ccw(c111.7,88.6) 111.7,90.5 31.7,90.5 ccw(c31.7,88.6) 29.8,88.6 29.8,63.2 34.9,63.2
GND_B on Top Layer "NONET_L-01_P-001" (solid, remove dead copper, pour order 20): 44.7,44.7 47.1,47.1 52.4,47.1 53.6,48.3 53.6,58 51.5,60.1 46.3,60.1 46.3,64.6 113.6,64.6 113.6,41.2 cw(c111.7,41.2) 111.7,39.3 57.8,39.3 52.5,44.6 48.5,44.6 48,44.1 48,42.1 47.1,41.2 45.7,41.2 44.7,42.2
+VCC_B on Top Layer "NONET_L-01_P-001" (solid, remove dead copper, pour order 1): 97.3,54.1 97,54.4 97,63.4 97.1,63.5 108.7,63.5 109,63.2 109,61 102.1,54.1
+VCC_A on Top Layer "NONET_L-01_P-001" (solid, remove dead copper, pour order 2): 97.3,75.9 97,75.6 97,66.6 97.1,66.5 103.5,66.5 109,72 109,73.9 107,75.9
NetD1_1 on Top Layer "NONET_L-01_P-001" (solid, remove dead copper, pour order 15): 78.9,83.9 76,83.9 74.6,82.5 73.4,81.3 71.3,81.3 71.1,81.5 71.1,83.7 73.1,85.7 79.9,85.7 82.4,83.2 82.4,78 72.9,68.5 65.9,68.5 65.8,68.6 65.8,70.9 65.9,71 68.6,71 69.6,72 69.6,74.1 69.8,74.3 75.7,74.3 80.3,78.9 80.3,82.5
NetC3_1 on Top Layer "NONET_L-01_P-001" (solid, remove dead copper, pour order 14): 79.8,69 79.8,74.1 80,74.3 83.4,74.3 87,70.7 95.5,70.7 95.6,70.6 95.6,66.6 95.5,66.5 82.3,66.5
NetC7_1 on Top Layer "NONET_L-01_P-001" (solid, remove dead copper, pour order 12): 79.9,61 79.9,55.9 80.1,55.7 83.5,55.7 87.1,59.3 95.6,59.3 95.7,59.4 95.7,63.4 95.6,63.5 82.4,63.5
NetD4_1 on Top Layer "NONET_L-01_P-001" (solid, remove dead copper, pour order 10): 65.9,61.5 65.8,61.4 65.8,59.1 65.9,59 68.6,59 69.6,58 69.6,55.9 69.8,55.7 75.7,55.7 80.3,51.1 80.3,48.5 79.6,47.8 77.6,47.8 76.7,48.7 75.8,48.7 75.2,48.1 75.2,46.3 76.4,45.1 80.7,45.1 83.1,47.5 83.1,51.3 72.9,61.5
SEC_GND on Top Layer "NONET_L-01_P-001" (solid, remove dead copper, pour order 9): 36.7,56 36.9,55.8 36.9,46.7 39.5,44.1 42.7,44.1 43.1,43.7 43.1,41.6 42.7,41.2 39.3,41.2 33.2,47.3 33.2,49.5 33.4,49.7 34.4,49.7 34.6,49.9 34.6,55.8 34.8,56
V_IN_B on Top Layer "NONET_L-01_P-001" (solid, remove dead copper, pour order 8): 49.9,52.1 61.4,52.1 62.2,51.3 75.5,51.3 76,50.8 76,49.4 76.8,48.6 79,48.6 79.1,48.7 79.1,51.7 77.4,53.4 65.8,53.4 64.1,55.1 53.5,55.1 49.1,59.5 46.8,59.5 44.7,57.4 44.7,48.8 45.6,47.9 47.3,47.9 48.2,48.8 48.2,49.9 48.2,50.4
V_IN_SEC on Top Layer "NONET_L-01_P-001" (solid, remove dead copper, pour order 6): 35,61.3 34.3,60.6 34.3,59.3 40.1,53.5 40.1,48.8 41,47.9 42.7,47.9 43.6,48.8 43.6,54.5 36.8,61.3
GND_A on Bottom Layer "NONET_L-01_P-001" (solid, remove dead copper, pour order 19): 37.1,65.4 37.1,66.5 33.5,70.1 33.5,72.9 34.4,73.8 42.7,73.8 45.3,71.2 45.3,65.4 113.6,65.4 113.6,88.6 ccw(c111.7,88.6) 111.7,90.5 31.7,90.5 ccw(c31.7,88.6) 29.8,88.6 29.8,63.2 34.9,63.2
GND_B on Bottom Layer "NONET_L-01_P-001" (solid, remove dead copper, pour order 18): 44.7,44.7 47.1,47.1 52.4,47.1 53.6,48.3 53.6,58 51.5,60.1 47.6,60.1 46.3,61.4 46.3,63.2 47.7,64.6 113.6,64.6 113.6,41.2 cw(c111.7,41.2) 111.7,39.3 57.8,39.3 52.5,44.6 48.5,44.6 48,44.1 48,42.1 47.1,41.2 45.7,41.2 44.7,42.2
V_IN_A on Bottom Layer "NONET_L-01_P-001" (solid, remove dead copper, pour order 17): 46.2,55.9 43.5,58.6 43.5,65.6 36.5,72.6 34.9,72.6 34.1,71.8 34.1,70.2 40.1,64.2 40.1,57.8 44.8,53.1 46.8,53.1 49.4,50.5 49.4,48.8 50.2,48 51.8,48 52.6,48.8 52.6,51.7 48.4,55.9
GND_A on Bottom Layer "NONET_L-01_P-001" (solid, remove dead copper, pour order 11): 36.4,66.9 36.6,66.7 36.6,64.9 31.84,60.14 31.84,49.06 40.2,40.7 48.2,40.7 49.6,42.1 49.6,43.5 50.2,44.1 51.7,44.1 52.4,43.4 52.4,40.9 50.7,39.2 38.7,39.2 29.8,48.1 29.8,63.3 33.4,66.9

## Silkscreen, mask and mechanical layers (free items; w line width, h text height)
Top Overlay:
  pour cut-out: 102.2,64.3 103.8,64.3 103.8,54.7 102.2,54.7
  pour cut-out: 102.2,75.2 103.8,75.2 103.8,65.6 102.2,65.6
  pour cut-out: 41.7,63.7 40.1,63.7 40.1,73.3 41.7,73.3
  pour cut-out: 41.7,52.8 40.1,52.8 40.1,62.4 41.7,62.4
  lines w0.2: 29.4,63 41.3,63 ccw(c41.3,63.966) 41.983,63.283 43.346,64.646 ; 42.8,51.3 42.8,51.9 ; 42.8,52.5 42.8,53 ; 42.8,53.6 42.8,54.1 ; 42.8,54.7 42.8,55.2 ; 42.8,55.8 42.8,56.3 ; 42.8,56.9 42.8,57.4 ; 42.8,58 42.8,58.5 ; 42.8,59.1 42.8,59.6 ; 42.8,60.2 42.8,60.7 ; 42.8,61.3 42.8,61.8 ; 42.8,62.4 42.8,63.327 cw(c44.666,63.327) 43.346,64.646 ; 44.9,39.6 44.5,40 ; 44.9,40.4 44.5,40 ; 48,39.6 48.4,40 ; 48,40.4 48.4,40 ; 113.8,65 44.2,65 ccw(c44.2,63.793) 43.346,64.646 ; 44.5,40 48.4,40
  lines w0.254: 52.8,55.4 52.8,56.2 ; 53.576,56.2 52.8,56.2 ; 55.936,54.676 cw(c56.136,59.076) 52.8,56.2 ; 59,75.4 cw(c58.8,71) 62.136,73.876 ; 61.36,73.876 62.136,73.876 ; 62.136,74.676 62.136,73.876 ; 104.1,46.3 cw(c103.7,46.3) 103.7,45.9 ; 104.1,83.8 ccw(c103.7,83.8) 103.7,84.2 ; 107.4,46.3 cw(c107,46.3) 107,45.9 103.7,45.9 ; 107.4,83.8 ccw(c107,83.8) 107,84.2 103.7,84.2 ; 102.1,45.9 98,45.9 98,48.4 102.1,48.4 102.1,45.9 ; 102.1,45.9 103.7,45.9 ; 102.1,84.2 98,84.2 98,81.7 102.1,81.7 102.1,84.2 ; 102.1,84.2 103.7,84.2 ; 30.1,78.6 35.1,78.6 35.1,85.6 30.1,85.6 30.1,78.6 ; 35.1,40.5 35.1,51.7 37.9,51.7 37.9,40.5 35.1,40.5
  lines w0.4: 29.506,41.194 ccw(c31.7,41.194) 31.7,39 111.706,39 ccw(c111.706,41.194) 113.9,41.194 113.9,88.606 ccw(c111.706,88.606) 111.706,90.8 31.7,90.8 ccw(c31.7,88.606) 29.506,88.606 29.506,41.194
  text "V-" at 111.1,87.956 h2
  text "V+" at 111.1,85.256 h2
  text "ONLY USE ONE EXTERNAL SUPPLY!" at 29.823,85.191 h1.7 r270
  text "V-" at 99.544,82.18 h2 r90
  text "V+" at 101.644,82.18 h2 r90
  text "A" at 113.035,80.602 h6 r90
  text "+V" at 56.654,74.954 h1.02
  text "PRIMARY" at 40.051,73.3 h2.2 r270
  text "V+" at 113.644,72.15 h2 r90
  text "V+" at 29.956,71.85 h2 r270
  text "V-" at 113.644,67.121 h2 r90
  text "V-" at 29.956,66.679 h2 r270
  text "SUPPLY A" at 103.849,65.6 h2.2 r90
  text "SECONDARY" at 40.051,62.4 h2.2 r270
  text "V+" at 113.644,61.25 h2 r90
  text "V+" at 29.956,60.95 h2 r270
  text "V-" at 113.644,56.221 h2 r90
  text "V-" at 29.956,55.779 h2 r270
  text "SUPPLY B" at 103.849,54.7 h2.2 r90
  text "+V" at 56.554,54.154 h1.02
  text "SUPPLY B INPUT SELECT" at 35.326,51.487 h1.9 r270
  text "B" at 113.035,46.559 h6 r90
  text "V-" at 99.544,46.4 h2 r90
  text "V+" at 101.644,46.4 h2 r90
  text "V-" at 111.1,43.456 h2
  text "V+" at 111.1,40.756 h2
  text "SEC" at 40.681,39.456 h2
  text "PRI" at 49.503,39.456 h2
Bottom Overlay:
  drawing of 138 lines, arcs and shapes, not listed
  text "V-" at 112.62,87.956 h2
  text "V+" at 112.62,85.256 h2
  text "V-" at 99.544,83.7 h2 r90
  text "V+" at 101.644,83.7 h2 r90
  text "VERSION 2.1 / FEBRUARY 2026" at 73.999,78.557 h1.8 r90
  text "USB-C /  BREADBOARD  /   POWER SUPPLY" at 69.074,78.2 h4 r90
  text "IEEE PCB WORKSHOP SPRING 2026" at 83.336,76.013 h2 r90
  text "V+" at 113.644,73.85 h2 r90
  text "SUPPLY OUTPUTS" at 105.235,73.013 h2 r90
  text "V+" at 29.956,70.15 h2 r270
  text "V-" at 113.644,68.679 h2 r90
  text "DO NOT USE USB AND DC SUPPLY TOGETHER" at 38.9,66.453 h2 r270
  text "DESIGNED BY: / ADRIAN SUCAHYO" at 73.559,66.026 h1.8 r90
  text "V-" at 29.956,65.121 h2 r270
  text "V+" at 113.644,62.95 h2 r90
  text "+20V MAX INPUT" at 40.121,60.942 h2 r270
  text "V+" at 29.956,59.25 h2 r270
  text "V-" at 113.644,57.779 h2 r90
  text "V-" at 29.956,54.221 h2 r270
  text "DO NOT REVERSE SUPPLY POLARITY" at 39.5,52.302 h2 r270
  text "V-" at 99.544,47.92 h2 r90
  text "V+" at 101.644,47.92 h2 r90
  text "SUPPLY B INPUT SELECT" at 51.987,44.926 h1.9
  text "V-" at 112.62,43.456 h2
  text "V+" at 112.62,40.756 h2
  text "SEC" at 43.519,39.456 h2
  text "PRI" at 52.297,39.456 h2